# EAGLE board TeamB_PowerBoard (EAGLE 7.1.0)
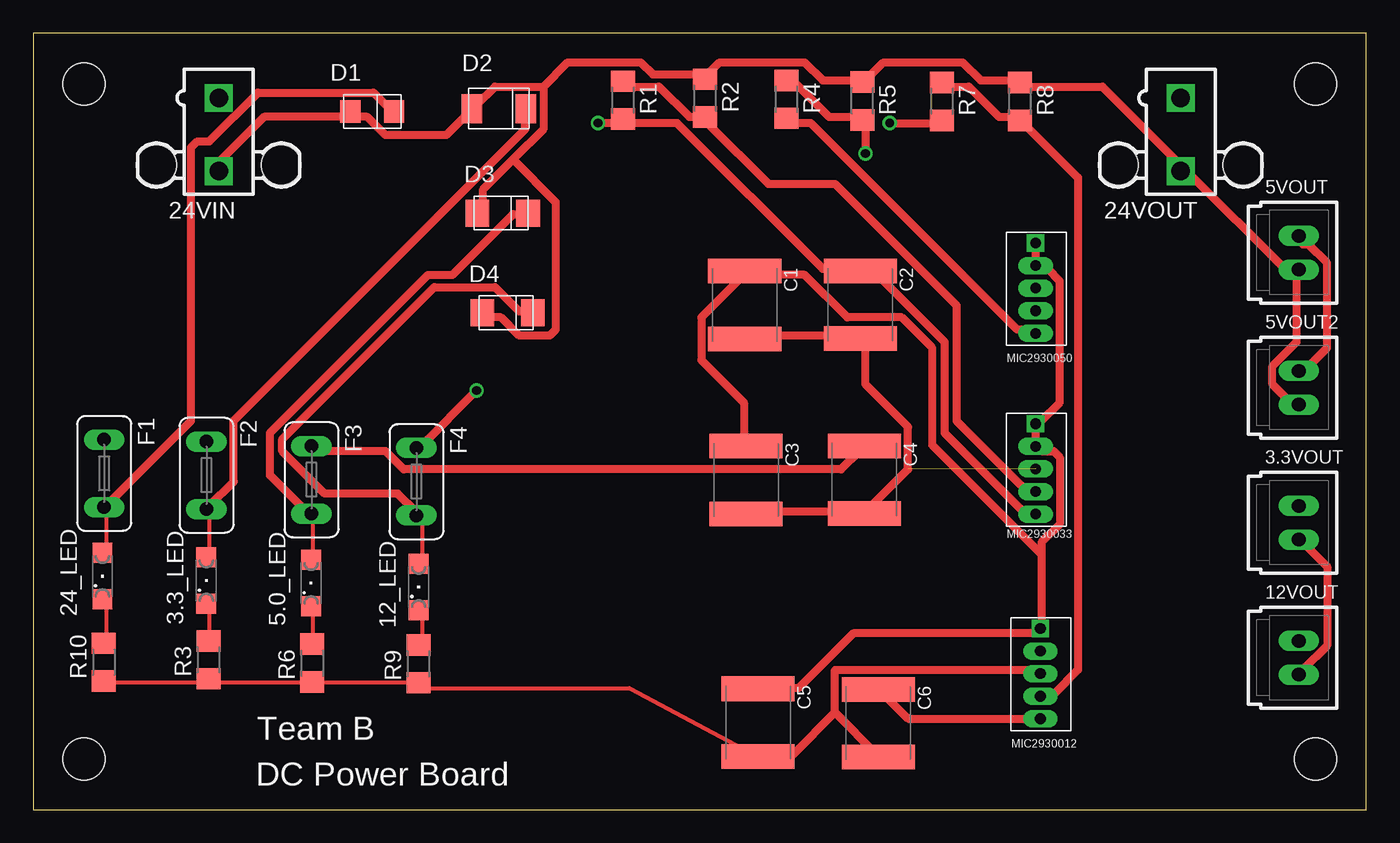
[diagram p0: board, top side]
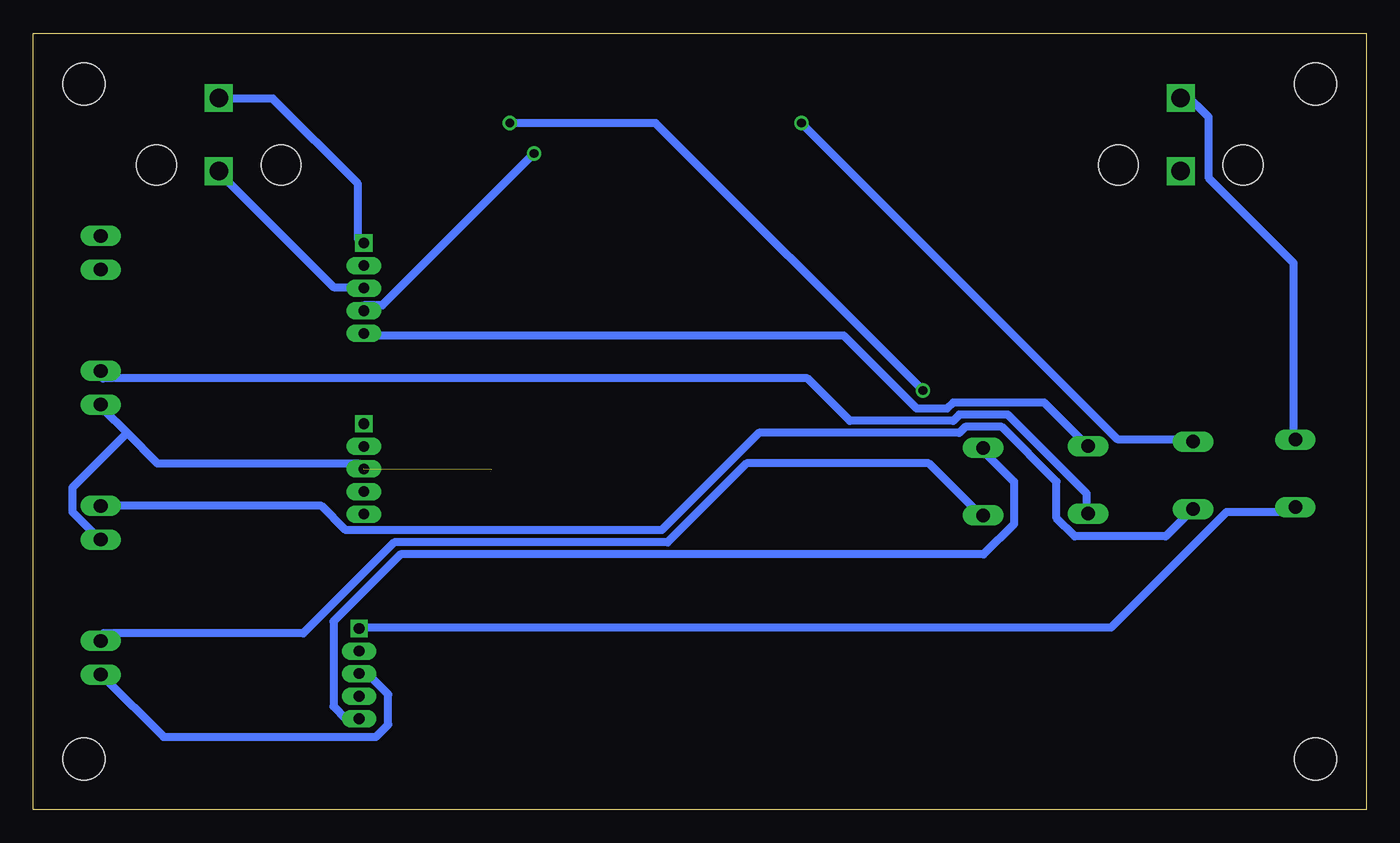
[diagram p1: board, bottom side, seen from below]

Size 100.33 x 58.42 mm. Coordinates in mm from the lower left corner, seen from the top.
Outline: 0,0 100.33,0 100.33,58.42 0,58.42 0,0
Copper layers (1*16): Top 0.035mm / dielectric 1.5mm / Bottom 0.035mm
Design rules "default *": minimum track width 24mil, minimum drill 26mil, track to track 12mil, track to pad 8mil, pad to pad 8mil, via to via 8mil, smd to smd 8mil, copper to edge 40mil, drill to drill 8mil, minimum pad ring 10mil, minimum via ring 8mil, stop-mask expansion 4mil, vias tented up to drill 0mil, thermal gap 10mil
Holes 3.17 mm at 3.81,3.81 96.52,3.81 96.52,54.61 3.81,54.61
tKeepout: area 0.6,51.4 to 7,57.8; area 0.6,0.6 to 7,7; area 93.3,0.6 to 99.7,7; area 93.3,51.4 to 99.7,57.8

## Footprints (pad centres in the part's own frame; a part is rotated, then mirrored left to right if it is on the bottom)
SML1206 = smd 1.5 x 1.5: A 1.75,0; C -1.75,0
70543-02 = drill 1.016 long: 1 -1.27,0; 2 1.27,0
5566-2 = drill 1.4 square: 1 0,-2.75; 2 0,2.75 | hole 3: 4.7,2.29; -4.7,2.29
C2220K = smd 1.85 x 5.5: 1 -2.55,0; 2 2.55,0
DIODE_26 = smd 1.524 x 1.676: 1 -0.762,0; 2 2.54,0
SMBJ3V3 = smd 1.524 x 2.184: 1 -2.032,0; 2 2.032,0
DIODE_5V_16V = smd 1.778 x 2.032: 1 -0.762,0; 2 3.048,0
TE5 = drill 1.016 long: 1 -2.54,0; 2 2.54,0
R1206 = smd 1.6 x 1.803: 1 -1.422,0; 2 1.422,0
MIC29300WU = drill 0.8 pad 1.27 long: ADJ 2.2,2.6; EN 2.2,6; GND 2.2,4.3; VOUT 2.2,0.9 | drill 0.8 pad 1.27 square: VIN 2.2,7.7

## Placement (x,y rotation side)
3.3_LED  [SML1206]  13.03,17.24 90 top
3.3VOUT  CPU  [70543-02]  95.25,21.59 270 top
5.0_LED  [SML1206]  20.91,17.05 90 top
5VOUT  ENCODER  [70543-02]  95.25,41.91 270 top
5VOUT2  Wi-Fi  [70543-02]  95.25,31.75 270 top
12_LED  [SML1206]  29.01,16.76 90 top
12VOUT  LIDAR  [70543-02]  95.25,11.43 270 top
24_LED  [SML1206]  5.21,17.57 90 top
24VIN  5566-2  [5566-2]  13.97,50.8 180 top
24VOUT  5566-2  [5566-2]  86.36,50.8 180 top
C1  10uF  [C2220K]  53.55,37.97 270 top
C2  10uF  [C2220K]  62.25,37.99 270 top
C3  10uF  [C2220K]  53.65,24.81 270 top
C4  10uF  [C2220K]  62.55,24.83 270 top
C5  10uF  [C2220K]  54.55,6.55 270 top
C6  10uF  [C2220K]  63.61,6.51 270 top
D1  [DIODE_26]  24.63,52.54 0 top
D2  SMBJ3V3  [SMBJ3V3]  35.05,52.75 0 top
D3  DIODE_5V_16V  [DIODE_5V_16V]  34.2,44.89 0 top
D4  DIODE_5V_16V  [DIODE_5V_16V]  34.56,37.39 0 top
F1  15A  [TE5]  5.34,25.3 270 top
F2  4.5A  [TE5]  13.04,25.16 270 top
F3  4.5A  [TE5]  20.94,24.82 270 top
F4  4.5A  [TE5]  28.84,24.68 270 top
R1  1k  [R1206]  44.4,53.38 270 top
R2  1.69k  [R1206]  50.58,53.53 270 top
R3  180  [R1206]  13.19,11.28 90 top
R4  1k  [R1206]  56.7,53.44 270 top
R5  3k  [R1206]  62.4,53.32 270 top
R6  350  [R1206]  20.99,11.04 90 top
R7  1k  [R1206]  68.4,53.28 270 top
R8  8.66k  [R1206]  74.28,53.28 270 top
R9  1K  [R1206]  28.99,10.98 90 top
R10  2.2K  [R1206]  5.31,11.11 90 top
U$1  MIC29300  [MIC29300WU]  73.25,21.34 0 top
U$2  MIC29300  [MIC29300WU]  73.25,34.94 0 top
U$3  MIC29300  [MIC29300WU]  73.6,5.94 0 top

## Library data of the parts
3.3_LED 5.0_LED 12_LED 24_LED = led
3.3VOUT 5VOUT 5VOUT2 12VOUT = con-molex; OC_FARNELL: unknown; OC_NEWARK: unknown
24VIN 24VOUT = con-molex; OC_FARNELL: 1822072; OC_NEWARK: unknown
C1-C6 = resistor
D1-D4 = TVS_Diode
F1-F4 = fuse; OC_FARNELL: unknown; OC_NEWARK: unknown
R1-R10 = rcl
U$1 = MIC2930033WU
U$2 = MIC2930050WU
U$3 = MIC2930012WU

## Nets
GND: 3.3VOUT.2 5VOUT2.2 5VOUT.2 12VOUT.2 24VIN.2 24VOUT.2 C1.2 C2.2 C3.2 C4.2 C5.2 C6.2 D1.1 D2.1 D3.1 D4.1 R2.1 R3.1 R5.1 R6.1 R8.1 R9.1 R10.1 U$1.GND U$2.GND U$3.GND
N$1: 24_LED.A 24VOUT.1 C1.1 C3.1 C5.1 D1.2 F1.2 U$1.EN U$1.VIN U$2.EN U$2.VIN U$3.VIN
N$2: 5.0_LED.C R6.2
N$3: 24_LED.C R10.2
N$4: 5.0_LED.A 5VOUT2.1 5VOUT.1 D3.2 F3.2
N$5: C2.1 F2.1 R1.2 U$1.VOUT
N$6: 12_LED.A 12VOUT.1 D4.2 F4.2
N$7: C4.1 F3.1 R4.2 U$2.VOUT
N$8: C6.1 F4.1 R7.2 U$3.VOUT
N$9: 3.3_LED.A 3.3VOUT.1 D2.2 F2.2
N$10: 12_LED.C R9.2
N$11: 3.3_LED.C R3.2
N$12: R1.1 R2.2 U$1.ADJ
N$13: R4.1 R5.2 U$2.ADJ
N$19: R7.1 R8.2 U$3.ADJ
VCC: 24VIN.1 F1.1

## Tracks (layer width: path | path; a pad name or v marks a point on that pad's centre or on a via)
GND  (1 unrouted)
  Top 0.305: 5.49,9.6 12.93,9.6 R3.1 | 13.26,9.6 20.97,9.6 R6.1 | 21.03,9.6 28.95,9.6 R9.1 | 29.26,9.14 44.87,9.14 C5.2
  Top 0.61: C1.2 53.95,35.66 62.18,35.66 C2.2 62.64,35.2 62.64,32 65.84,28.8 65.84,25.6 62.64,22.4 C4.2 62.18,22.4 53.95,22.4 C3.2 53.49,21.95 | 5.49,9.6 R10.1 | 12.8,9.6 R3.1 13.26,9.6 | 20.57,9.6 R6.1 21.03,9.6 | 28.8,9.6 R9.1 29.26,9.14 | 60.35,7.32 60.35,10.52 75.44,10.52 U$3.GND | 60.35,7.32 63.55,4.12 C6.2 | 60.35,7.32 57.15,4.12 54.86,4.12 C5.2 54.41,4.12 | 12VOUT.2 95.56,10.52 97.38,12.34 97.38,18.29 95.56,20.12 3.3VOUT.2 | 5VOUT2.2 95.1,30.18 93.27,32 93.27,33.38 95.1,35.2 95.1,40.23 5VOUT.2 95.1,40.69 94.18,40.69 86.87,48.01 24VOUT.2 86.41,48.46 80.47,54.41 74.52,54.41 R8.1 74.07,54.86 71.32,54.86 69.95,56.24 64.01,56.24 62.64,54.86 R5.1 62.18,54.86 59.44,54.86 58.06,56.24 51.66,56.24 50.75,55.32 R2.1 50.29,55.32 46.63,55.32 45.72,56.24 40.23,56.24 38.41,54.41 | 36.12,48.92 38.41,51.21 38.41,54.41 | 36.12,48.92 33.83,46.63 33.83,45.26 D3.1 | 38.41,54.41 34.75,54.41 33.38,53.03 D2.1 32.92,52.58 31.09,50.75 26.52,50.75 25.15,52.12 24.23,52.12 D1.1 23.77,52.12 17.37,52.12 14.17,48.92 24VIN.2 | 36.12,48.92 39.32,45.72 39.32,36.12 38.86,35.66 36.58,35.66 35.2,37.03 33.83,37.03 D4.1
  Bottom 0.61: U$2.GND 75.89,39.32 77.72,39.32 86.41,48.01 24VOUT.2 | 93.27,28.35 95.1,30.18 5VOUT2.2 | 93.27,28.35 90.98,26.06 75.89,26.06 U$1.GND | 93.27,28.35 97.38,24.23 97.38,22.4 95.56,20.57 3.3VOUT.2 | U$3.GND 75.44,10.06 74.98,10.06 73.61,8.69 73.61,6.4 74.52,5.49 90.53,5.49 95.1,10.06 12VOUT.2
N$1
  Top 0.305: 5.49,22.4 5.49,19.6 24_LED.A
  Top 0.61: 5.49,19.66 24_LED.A | 5.49,22.4 F1.2 5.49,22.86 11.89,29.26 11.89,49.84 12.34,50.29 13.26,50.29 16.92,53.95 25.6,53.95 26.98,52.58 D1.2 | C3.1 53.49,27.43 53.49,30.63 50.29,33.83 50.29,37.03 53.49,40.23 C1.1 53.95,40.23 58.06,40.23 61.27,37.03 65.38,37.03 67.67,34.75 67.67,27.43 75.89,19.2 | U$2.VIN 75.44,42.52 75.44,41.15 U$2.EN 75.89,40.69 76.35,40.69 77.27,39.78 77.27,30.63 75.89,29.26 U$1.VIN 75.44,28.8 75.44,27.43 U$1.EN 75.89,26.98 76.81,26.98 77.27,26.52 77.27,21.49 75.89,20.12 75.89,19.2 | 75.89,19.2 75.89,13.72 U$3.VIN 75.44,13.26 61.72,13.26 57.61,9.14 54.86,9.14 C5.1
  Bottom 0.61: 24VOUT.1 86.41,53.49 82.3,53.49 75.89,47.09 75.89,42.98 U$2.VIN | F1.2 5.49,22.4 10.52,22.4 19.2,13.72 75.44,13.72 U$3.VIN
N$2
  Top 0.305: 21.03,15.09 21.03,12.5 R6.2
  Top 0.61: 21.03,15.09 5.0_LED.C | 21.03,12.8 R6.2
N$3
  Top 0.305: 5.49,15.54 5.49,12.71 R10.2
  Top 0.61: 5.49,15.54 24_LED.C | 5.49,12.8 R10.2
N$4
  Top 0.305: 21.03,21.95 21.03,18.92 5.0_LED.A
  Top 0.61: 5VOUT.1 95.56,42.52 96.01,42.52 97.38,41.15 97.38,34.75 95.56,32.92 5VOUT2.1 | 21.03,19.2 5.0_LED.A | 21.03,21.95 F3.2 20.57,22.4 17.83,25.15 17.83,28.35 29.72,40.23 31.55,40.23 36.12,44.81 37.03,44.81 D3.2
  Bottom 0.61: 5VOUT2.1 95.1,32.46 42.06,32.46 38.86,29.26 31.09,29.26 30.63,29.72 26.98,29.72 21.03,23.77 21.03,22.4 F3.2
N$5  (via drill 0.66)
  Top 0.61: U$1.VOUT 75.44,22.4 74.52,22.4 68.58,28.35 68.58,35.2 63.55,40.23 62.64,40.23 C2.1 62.18,40.69 59.44,40.69 48.46,51.66 44.81,51.66 R1.2 44.35,51.66 v42.52,51.66
  Bottom 0.61: v42.52,51.66 18.75,27.89 13.26,27.89 F2.1
N$6
  Top 0.305: 29.26,21.95 29.26,18.76 12_LED.A
  Top 0.61: 29.26,18.75 12_LED.A | 29.26,21.95 F4.2 28.8,22.4 27.43,23.77 21.95,23.77 18.75,26.98 18.75,27.89 30.18,39.32 34.75,39.32 36.58,37.49 37.49,37.49 D4.2
  Bottom 0.61: 12VOUT.1 95.1,13.26 80.01,13.26 73.15,20.12 52.58,20.12 46.63,26.06 32.92,26.06 29.26,22.4 F4.2
N$7
  Top 0.61: R4.2 57.15,51.66 58.52,51.66 74.07,36.12 75.44,36.12 U$2.VOUT | F3.1 21.03,26.98 26.52,26.98 27.89,25.6 60.81,25.6 62.18,26.98 C4.1
  Bottom 0.61: U$2.VOUT 75.44,35.66 39.32,35.66 33.83,30.18 31.55,30.18 31.09,30.63 24.23,30.63 21.03,27.43 F3.1
N$8  (via drill 0.66)
  Top 0.61: U$3.VOUT 75.44,6.86 65.84,6.86 64.01,8.69 C6.1 | v64.47,51.66 68.12,51.66 R7.2 | v33.38,31.55 29.26,27.43 F4.1
  Bottom 0.61: v64.47,51.66 53.49,51.66 v33.38,31.55 | U$3.VOUT 75.89,6.86 76.81,6.86 77.72,7.77 77.72,14.17 72.69,19.2 28.8,19.2 26.52,21.49 26.52,24.69 28.8,26.98 F4.1
N$9
  Top 0.305: 13.26,22.4 13.26,19.22 3.3_LED.A
  Top 0.61: 13.26,19.2 3.3_LED.A | 13.26,22.4 F2.2 13.26,22.86 15.09,24.69 15.09,29.26 37.03,51.21 37.03,52.58 D2.2
  Bottom 0.61: 3.3VOUT.1 78.64,22.86 76.81,21.03 53.03,21.03 45.72,28.35 30.63,28.35 30.18,28.8 27.43,28.8 23.32,24.69 23.32,21.95 21.95,20.57 15.09,20.57 13.26,22.4 F2.2
N$10
  Top 0.305: 29.26,14.63 29.26,12.67 R9.2
  Top 0.61: 29.26,14.63 12_LED.C | 29.26,12.8 R9.2
N$11
  Top 0.305: 13.26,15.09 13.26,12.77 R3.2
  Top 0.61: 13.26,15.09 3.3_LED.C | 13.26,12.8 R3.2
N$12
  Top 0.61: R1.1 44.81,54.41 47.09,54.41 49.38,52.12 50.29,52.12 R2.2 50.75,51.66 55.32,47.09 60.35,47.09 69.49,37.95 69.49,29.26 74.52,24.23 75.44,24.23 U$1.ADJ
N$13  (via drill 0.66)
  Top 0.61: R4.1 57.15,54.86 59.89,52.12 62.18,52.12 R5.2 62.64,51.66 v62.64,49.38
  Bottom 0.61: v62.64,49.38 74.07,37.95 75.44,37.95 U$2.ADJ
N$19
  Top 0.61: R7.1 68.58,54.41 70.41,54.41 72.69,52.12 74.07,52.12 R8.2 74.52,51.66 78.64,47.55 78.64,10.52 76.81,8.69 75.89,8.69 U$3.ADJ
VCC
  Bottom 0.61: F1.1 5.49,27.89 5.49,41.15 11.89,47.55 11.89,52.12 13.72,53.95 24VIN.1

## Text on the board
tNames: Team B | DC Power Board